# Altium PCB EASAT_TRANSPONDER.PcbDoc
Units mm, origin at the board's own origin, x right, y up, seen from the top; angles counter-clockwise.
Board outline 42 x 42 mm, 2 copper layers (Top Layer, Bottom Layer); 95 components, 47 nets, 205 pads, 0 vias.
Unrouted connection lines stored in the file: 155.
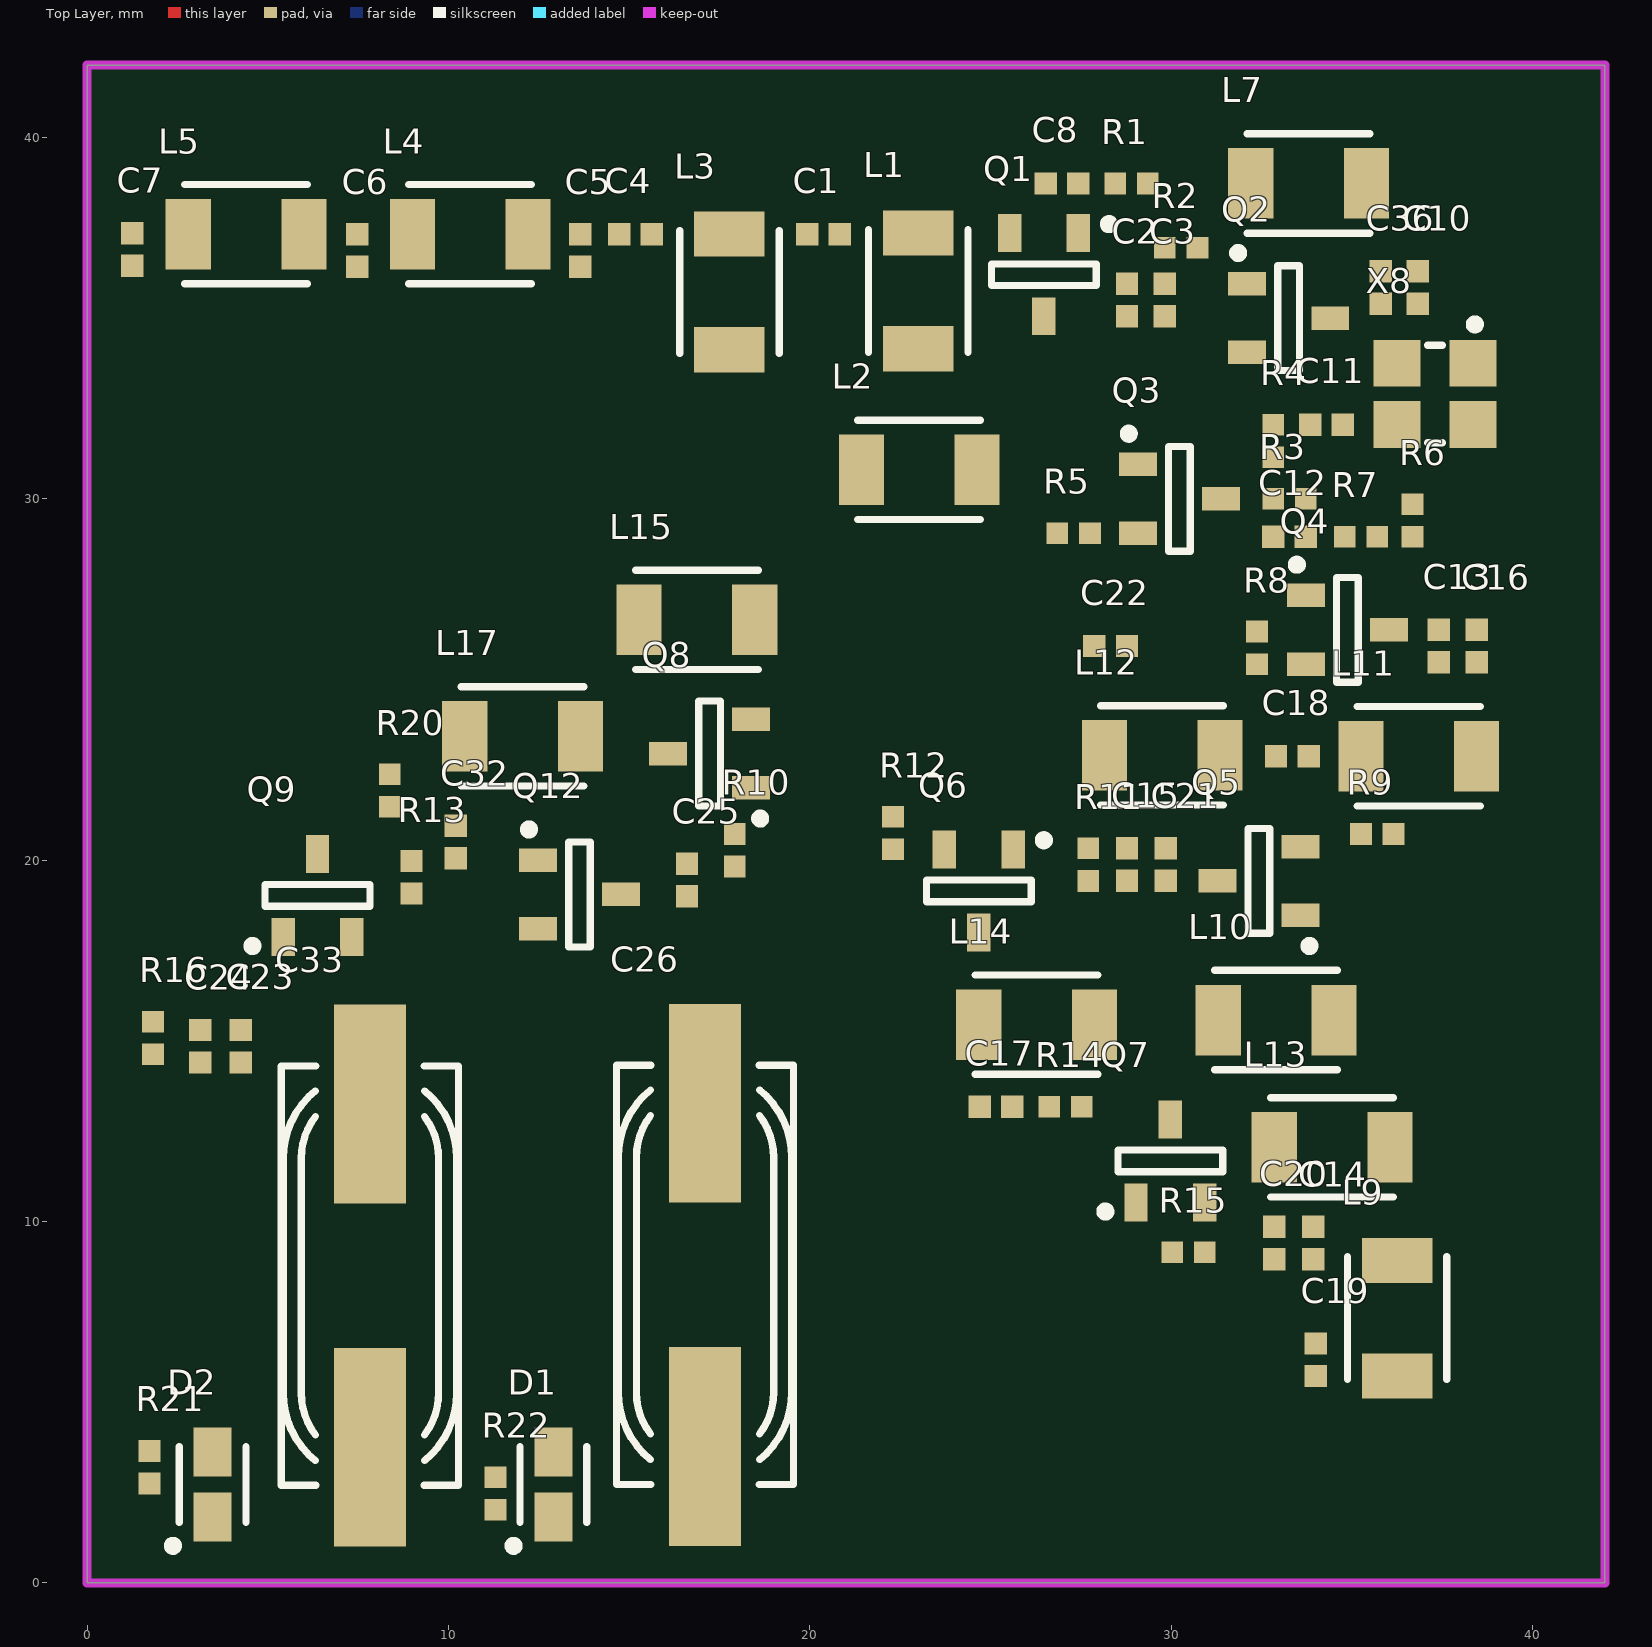
[diagram p0: Top Layer view]
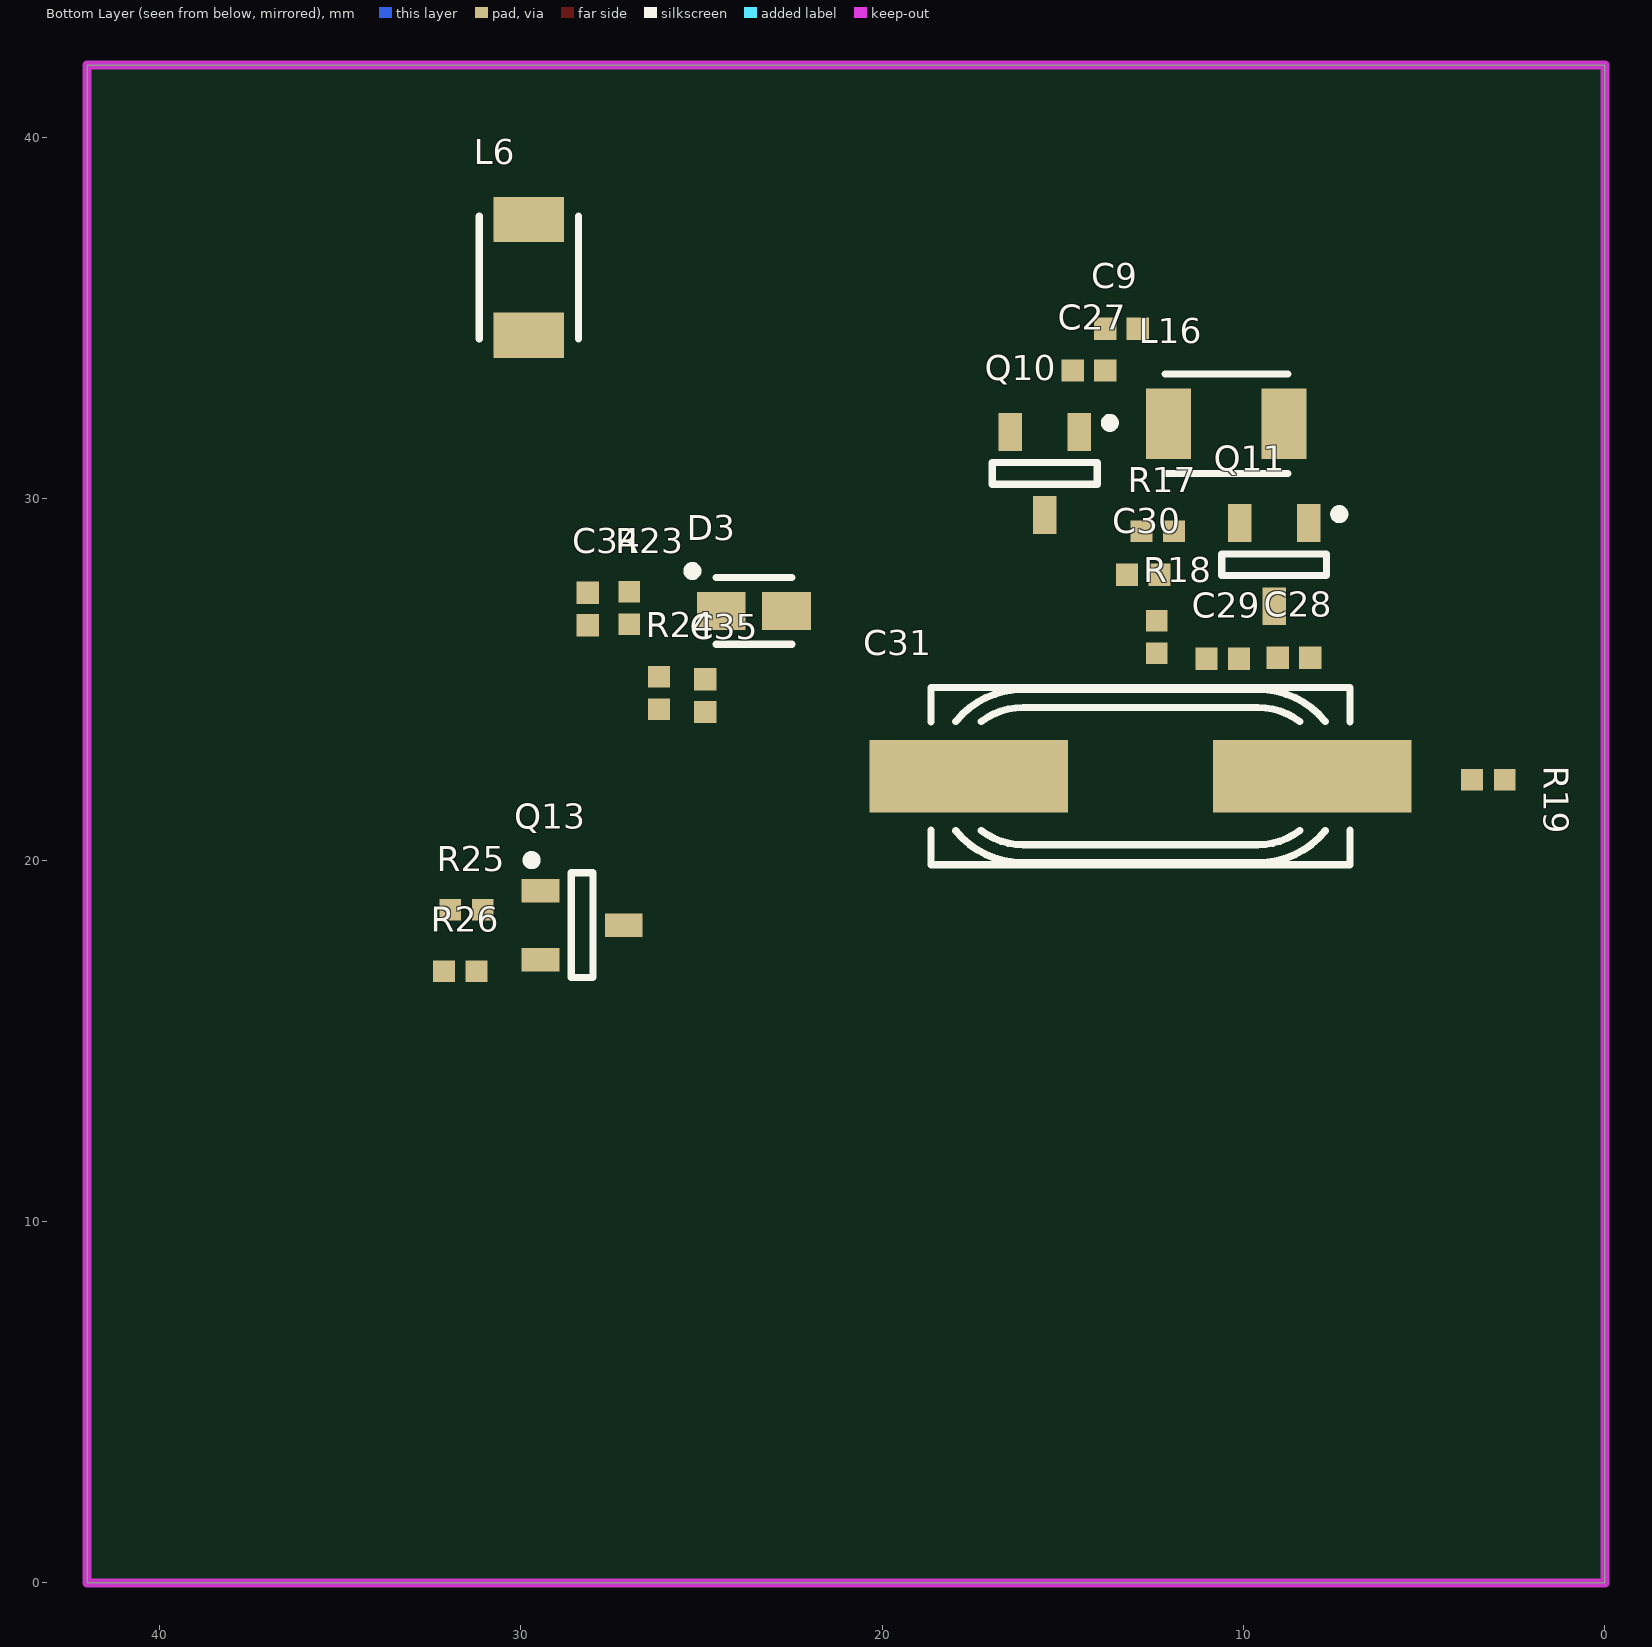
[diagram p1: Bottom Layer view, seen from below]

## Layer stack, top to bottom
Top Solder: solder mask 0.0102, Solder Resist, Dk 3.5
Top Layer: signal copper 0.0356
Dielectric 1: dielectric 0.32, FR-4, Dk 4.8
Bottom Layer: signal copper 0.0356
Bottom Solder: solder mask 0.0102, Solder Resist, Dk 3.5

## Board outline
0,0 42,0 42,42 0,42

## Design rules (kind name [scope] priority, off if disabled: settings)
Clearance [All] p1: gap=0.254
PolygonConnect [All] p1: connectstyle=Relief reliefconductorwidth=0.254 reliefentries=4 polygonreliefangle="90 Angle" airgapwidth=0.254
RoomDefinition EASAT_TRANSPODER [InComponentClass('EASAT_TRANSPODER')] p1: confinementstyle=ConfineIn formatcopy=TRUE lockcomponents=FALSE outline -210.439,-99.949 -159.639,-99.949 -159.639,-74.549 -210.439,-74.549
RoutingVias [All] p1: holewidth=0.711 width=1.27 viastyle="Through Hole" minholewidth=0.711 minwidth=1.27 maxholewidth=0.711 maxwidth=1.27
SolderMaskExpansion [All] p1: expansion=0.102
Width [All] p1: maxlimit=0.254 minlimit=0.254 preferedwidth=0.254
29 further rules are at their usual default settings.

## Components (designator, comment, footprint, x,y, rotation, side; value= is the part's Value field where it differs from the comment)
C1 "10nF" CAPC1005X55N 20.375,37.325 r0 top
C2 "10nF" CAPC1005X55N 28.775,35.5 r270 top
C3 "10nF" CAPC1005X55N 29.825,35.5 r90 top
C4 "10nF" CAPC1005X55N 15.175,37.325 r0 top
C5 "10nF" CAPC1005X55N 13.65,36.875 r90 top
C6 "10nF" CAPC1005X55N 7.475,36.875 r90 top
C7 "10nF" CAPC1005X55N 1.25,36.9 r90 top
C8 "10nF" CAPC1005X55N 26.975,38.725 r0 top
C9 "10nF" CAPC1005X55N 13.375,34.7 r0 bottom
C10 "10nF" CAPC1005X55N 36.825,35.85 r270 top
C11 "10nF" CAPC1005X55N 34.3,32.05 r180 top
C12 "10nF" CAPC1005X55N 33.275,28.95 r0 top
C13 "10nF" CAPC1005X55N 37.4,25.925 r270 top
C14 "10nF" CAPC1005X55N 33.925,9.4 r270 top
C15 "10nF" CAPC1005X55N 28.775,19.875 r90 top
C16 "10nF" CAPC1005X55N 38.45,25.925 r270 top
C17 "10nF" CAPC1005X55N 25.15,13.175 r0 top
C18 "10nF" CAPC1005X55N 33.35,22.875 r0 top
C19 "10nF" CAPC1005X55N 34,6.175 r270 top
C20 "10nF" CAPC1005X55N 32.85,9.4 r270 top
C21 "10nF" CAPC1005X55N 29.85,19.875 r270 top
C22 "10nF" CAPC1005X55N 28.325,25.925 r0 top
C23 "10nF" CAPC1005X55N 4.25,14.85 r90 top
C24 "10nF" CAPC1005X55N 3.125,14.85 r270 top
C25 "10nF" CAPC1005X55N 16.6,19.45 r90 top
C26 "6MHz" XTAL1160X490X430 17.1,8.525 r90 top
C27 "10nF" CAPC1005X55N 14.275,33.55 r180 bottom
C28 "10nF" CAPC1005X55N 8.6,25.6 r180 bottom
C29 "10nF" CAPC1005X55N 10.575,25.575 r180 bottom
C30 "10nF" CAPC1005X55N 12.775,27.9 r180 bottom
C31 "6MHz" XTAL1160X490X430 12.85,22.325 r180 bottom
C32 "10nF" CAPC1005X55N 10.2,20.5 r90 top
C33 "6MHz" XTAL1160X490X430 7.825,8.5 r90 top
C34 "10nF" CAPC1005X55N 28.15,26.95 r90 bottom
C35 "10nF" CAPC1005X55N 24.9,24.55 r90 bottom
C36 "10nF" CAPC1005X55N 35.8,35.85 r90 top
D1 "BAS216" DIOM2012X160N 12.9,2.725 r90 top
D2 "BAS216" DIOM2012X160N 3.475,2.725 r90 top
D3 "BAS216" DIOM2012X160N 23.55,26.9 r180 bottom
L1 "5.6nH" INDM3225X240N 23,35.75 r90 top
L2 "5.6nH" INDM3225X240N 23.025,30.8 r180 top
L3 "5.6nH" INDM3225X240N 17.775,35.725 r90 top
L4 "5.6nH" INDM3225X240N 10.6,37.325 r0 top
L5 "5.6nH" INDM3225X240N 4.4,37.325 r0 top
L6 "5.6nH" INDM3225X240N 29.775,36.125 r90 bottom
L7 "5.6nH" INDM3225X240N 33.8,38.725 r180 top
L9 "5.6nH" INDM3225X240N 36.25,7.325 r270 top
L10 "5.6nH" INDM3225X240N 32.9,15.575 r0 top
L11 "5.6nH" INDM3225X240N 36.85,22.875 r180 top
L12 "5.6nH" INDM3225X240N 29.75,22.9 r0 top
L13 "5.6nH" INDM3225X240N 34.45,12.05 r0 top
L14 "5.6nH" INDM3225X240N 26.275,15.45 r0 top
L15 "5.6nH" INDM3225X240N 16.875,26.65 r0 top
L16 "5.6nH" INDM3225X240N 10.475,32.075 r180 bottom
L17 "5.6nH" INDM3225X240N 12.05,23.425 r180 top
Q1 "BC81840MTF" SOT95P240X110-3N 26.475,36.2 r270 top
Q2 "BC81840MTF" SOT95P240X110-3N 33.25,35 r0 top
Q3 "BC81840MTF" SOT95P240X110-3N 30.225,30 r0 top
Q4 "BC81840MTF" SOT95P240X110-3N 34.875,26.375 r0 top
Q5 "BC81840MTF" SOT95P240X110-3N 32.425,19.425 r180 top
Q6 "BC81840MTF" SOT95P240X110-3N 24.675,19.15 r270 top
Q7 "BC81840MTF" SOT95P240X110-3N 29.975,11.675 r90 top
Q8 "BC81840MTF" SOT95P240X110-3N 17.225,22.95 r180 top
Q9 "BC81840MTF" SOT95P240X110-3N 6.375,19.025 r90 top
Q10 "BC81840MTF" SOT95P240X110-3N 15.5,30.7 r270 bottom
Q11 "BC81840MTF" SOT95P240X110-3N 9.15,28.175 r270 bottom
Q12 "BC81840MTF" SOT95P240X110-3N 13.625,19.05 r0 top
Q13 "BSR18A" SOT95P240X110-3N 28.3,18.2 r180 bottom
R1 "0" RESC1005X40N 28.9,38.725 r0 top
R2 "0" RESC1005X40N 30.275,36.95 r0 top
R3 "0" RESC1005X40N 33.275,30 r0 top
R4 "0" RESC1005X40N 32.825,31.6 r90 top
R5 "0" RESC1005X40N 27.3,29.05 r0 top
R6 "0" RESC1005X40N 36.675,29.4 r90 top
R7 "0" RESC1005X40N 35.25,28.95 r0 top
R8 "0" RESC1005X40N 32.375,25.875 r270 top
R9 "0" RESC1005X40N 35.7,20.725 r0 top
R10 "0" RESC1005X40N 17.925,20.275 r90 top
R11 "0" RESC1005X40N 27.7,19.875 r270 top
R12 "0" RESC1005X40N 22.3,20.75 r270 top
R13 "0" RESC1005X40N 8.975,19.525 r90 top
R14 "0" RESC1005X40N 27.075,13.175 r0 top
R15 "0" RESC1005X40N 30.475,9.15 r0 top
R16 "0" RESC1005X40N 1.825,15.075 r90 top
R17 "0" RESC1005X40N 12.375,29.1 r180 bottom
R18 "0" RESC1005X40N 12.4,26.175 r270 bottom
R19 "0" RESC1005X40N 3.225,22.225 r180 bottom
R20 "0" RESC1005X40N 8.375,21.925 r90 top
R21 "0" RESC1005X40N 1.725,3.2 r90 top
R22 "0" RESC1005X40N 11.3,2.475 r90 top
R23 "0" RESC1005X40N 27,26.975 r90 bottom
R24 "0" RESC1005X40N 26.175,24.625 r270 bottom
R25 "0" RESC1005X40N 31.5,18.625 r180 bottom
R26 "0" RESC1005X40N 31.675,16.925 r180 bottom
X8 "25MHz" OSC_IQD_CFPS-39 37.3,32.9 r270 top

## Footprints (in the part's own frame and the unit in brackets; to place one, negate y for a bottom-side part, rotate by r counter-clockwise, add the part's x,y. Pads: shape width x height; smd on the part's side, far side on the other; paste and mask are expansions set on the pad)
CAPC1005X55N [mm] "Chip Capacitor, Body 1.0x0.55mm, IPC Medium Density"
  rect 0.62x0.62 smd: 1(-0.45,0) 2(0.45,0)
  body extent -0.52,-0.27 0.53,0.28, height 0.55
DIOM2012X160N [mm] "SOD110 Diode, Molded Body; 2.00mm L X 1.25mm W, IPC Medium Density"
  rect 1.35x1.05 smd: 1(-0.9,0) 2(0.9,0)
  silkscreen extent -1.82,-0.92 1.05,1.22, body extent -1.05,-0.7 1.05,0.7, height 1.6
INDM3225X240N [mm] "Inductor, Molded Body; 3.20mm L X 2.50mm W, IPC Medium Density"
  rect 1.25x1.95 smd: 1(-1.6,0) 2(1.6,0)
  silkscreen extent -1.7,-1.38 1.7,1.38, body extent -1.7,-1.35 1.7,1.35, height 2.4
OSC_IQD_CFPS-39 [mm] "Oscillator, Side Concave, 2.20mm Pitch; 4 Pin, 2.50mm L X 3.20mm W X 1.30mm H"
  rect 1.3x1.3 smd: 1(-0.85,1.05) 2(-0.85,-1.05) 3(0.85,-1.05) 4(0.85,1.05)
  silkscreen extent -2.05,-0.2 1.35,1.23, body extent -1.35,-1.7 1.35,1.7, height 1.3
RESC1005X40N [mm] "Chip Resistor, EIA 0402, Metric 1005, Body 1.0x0.5mm, IPC Medium Density"
  rect 0.6x0.6 smd: 1(-0.45,0) 2(0.45,0)
  body extent -0.52,-0.27 0.53,0.28, height 0.4
SOT95P240X110-3N [mm] "SOT23 3-Leads, Pitch 0.95mm - Body 1.3x2.9mm, IPC Medium Density"
  rect 1.05x0.65 smd: 1(-1.15,0.95) 2(-1.15,-0.95) 3(1.15,0)
  silkscreen extent -1.52,-1.45 0.3,1.92, body extent -1.25,-1.5 1.25,1.5, height 1.1
XTAL1160X490X430 [mm] "HC49/4H SMX Case, SMD Cristal, Body 11.6x4.9mm"
  rect 5.5x2 smd: 1(-4.75,0) 2(4.75,0)
  silkscreen extent -5.8,-2.45 5.8,2.45, body extent -7.15,-2.45 7.15,2.45, height 4.3

## Part data
C1 C2 C3 C4 C5 C6 C7 C8 C9 C10 C11 C12 C13 C14 C15 C16 C17 C18 C19 C20 C21 C22 C23 C24 C25 C27 C28 C29 C30 C32 C34 C35 C36: library part CC0402_10NF_16V_10%_X7R, "Non-polarised capacitor"
C26 C31 C33: library part "XTAL_6MHZ_RAKON_HC49/4H SMX_20/50/10/16", "Quartz Crystal"
D1 D2 D3: "Diode"
L1 L2 L3 L4 L5 L6 L7 L9 L10 L11 L12 L13 L14 L15 L16 L17: library part IND1210_5.6NH_5%_TDK_NLV32T, "Inductor"
Q1 Q2 Q3 Q4 Q5 Q6 Q7 Q8 Q9 Q10 Q11 Q12: "NPN Transistor"
Q13: "PNP Transistor"
R1 R2 R3 R4 R5 R6 R7 R8 R9 R10 R11 R12 R13 R14 R15 R16 R17 R18 R19 R20 R21 R22 R23 R24 R25 R26: library part R0402_0R_JUMPER, "Resistor - 1%"
X8: library part XTAL_7M-25.000MAAJ-T, "SMD Crystal 7M Series 25 MHz 18pF 30 ppm"

## Nets (pads, with @x,y where several pads share a name; then routed paths per layer and width w, separated by ;. In a path a pad name is that pad's centre, name@x,y a point inside that pad or via, vN(x,y) a via of type N, cw(c..) or ccw(c..) an arc to the next point about the centre after c; other vN are vias at no path point)
GND: C2.1 C5.1 C6.1 C7.1 C8.1 C14.1 C16.1 C19.1 C21.1 C22.1 C24.2 C27.1 C29.1 C31.1 C35.2 C36.1 D1.1 D2.1 L1.1 L3.1 L12.1 Q2.2 Q5.2 Q8.2 Q10.2 Q12.2 R5.1 R8.1 R12.1 R13.1 R15.1 R18.1 R23.1 R24.1 X8.2 X8.4
NetC1_1: C1.1 C4.2 L3.2
NetC1_2: C1.2 L1.2 Q1.2
NetC2_2: C2.2 C3.1 L2.1 Q1.3
NetC3_2: C3.2 L6.2 Q2.1 R2.1
NetC4_1: C4.1 C5.2 L4.2
NetC6_2: C6.2 L4.1 L5.2
NetC7_2: C7.2 L5.1
NetC8_2: C8.2 Q1.1 R1.1
NetC9_1: C9.1 L6.1
NetC9_2: C9.2 C27.2 L16.1 Q10.3
NetC10_1: C10.1 C36.2 L7.1 Q2.3
NetC10_2: C10.2 X8.1
NetC11_1: C11.1 X8.3
NetC11_2: C11.2 Q3.1 R4.2
NetC12_1: C12.1 Q3.3 R3.1 R4.1
NetC12_2: C12.2 C34.1 Q4.1 R7.1
NetC13_1: C13.1 Q4.3 R6.1 R7.2
NetC13_2: C13.2 C16.2 L11.1
NetC14_2: C14.2 C20.2 L9.1
NetC15_1: C15.1 C21.2 L10.1 Q5.3
NetC15_2: C15.2 Q6.1 R11.1
NetC17_1: C17.1 L14.1 Q6.3 R11.2
NetC17_2: C17.2 Q7.1 R14.1
NetC18_1: C18.1 C22.2 L12.2 L15.1 Q8.3
NetC18_2: C18.2 L11.2 Q5.1 R9.1
NetC19_2: C19.2 L9.2
NetC20_1: C20.1 L13.1 Q7.3 R14.2
NetC23_1: C23.1 C26.2 C33.2 Q9.1 R16.1
NetC23_2: C23.2 C24.1 C32.1 Q9.2 R13.2
NetC25_1: C25.1 L17.1 Q12.3
NetC25_2: C25.2 Q8.1 R10.1
NetC26_1: C26.1 D1.2 R22.2
NetC28_1: C28.1 C29.2 C30.2 Q11.2 R18.2
NetC28_2: C28.2 C31.2 Q11.1 R19.1
NetC30_1: C30.1 Q10.1 R17.1
NetC32_2: C32.2 Q12.1 R20.1
NetC33_1: C33.1 D2.2 R21.2
NetC34_2: C34.2 D3.2 R23.2
NetC35_1: C35.1 D3.1 R24.2
NetQ3_2: Q3.2 R5.2
NetQ4_2: Q4.2 R8.2
NetQ6_2: Q6.2 R12.2
NetQ7_2: Q7.2 R15.2
NetQ13_1: Q13.1 R25.2 R26.1
VCC: L2.2 L7.2 L16.2 Q11.3 Q13.2 R1.2 R2.2 R3.2 R6.2 R17.2 R19.2 R25.1
VCC_TX: L10.2 L13.2 L14.2 L15.2 L17.2 Q9.3 Q13.3 R9.2 R10.2 R16.2 R20.2
pads on no net: R21.1 R22.1 R26.2

## Keep-outs
Keep-Out Layer:
  the board outline again, w0.254